# Altium PCB MRF24J40MA.PcbDoc
Units mil, origin at the board's own origin, x right, y up, seen from the top; angles counter-clockwise.
Board outline 1500 x 785 mil, 2 copper layers (Top Layer, Bottom Layer); 3 components, 40 nets, 24 pads, 0 vias.
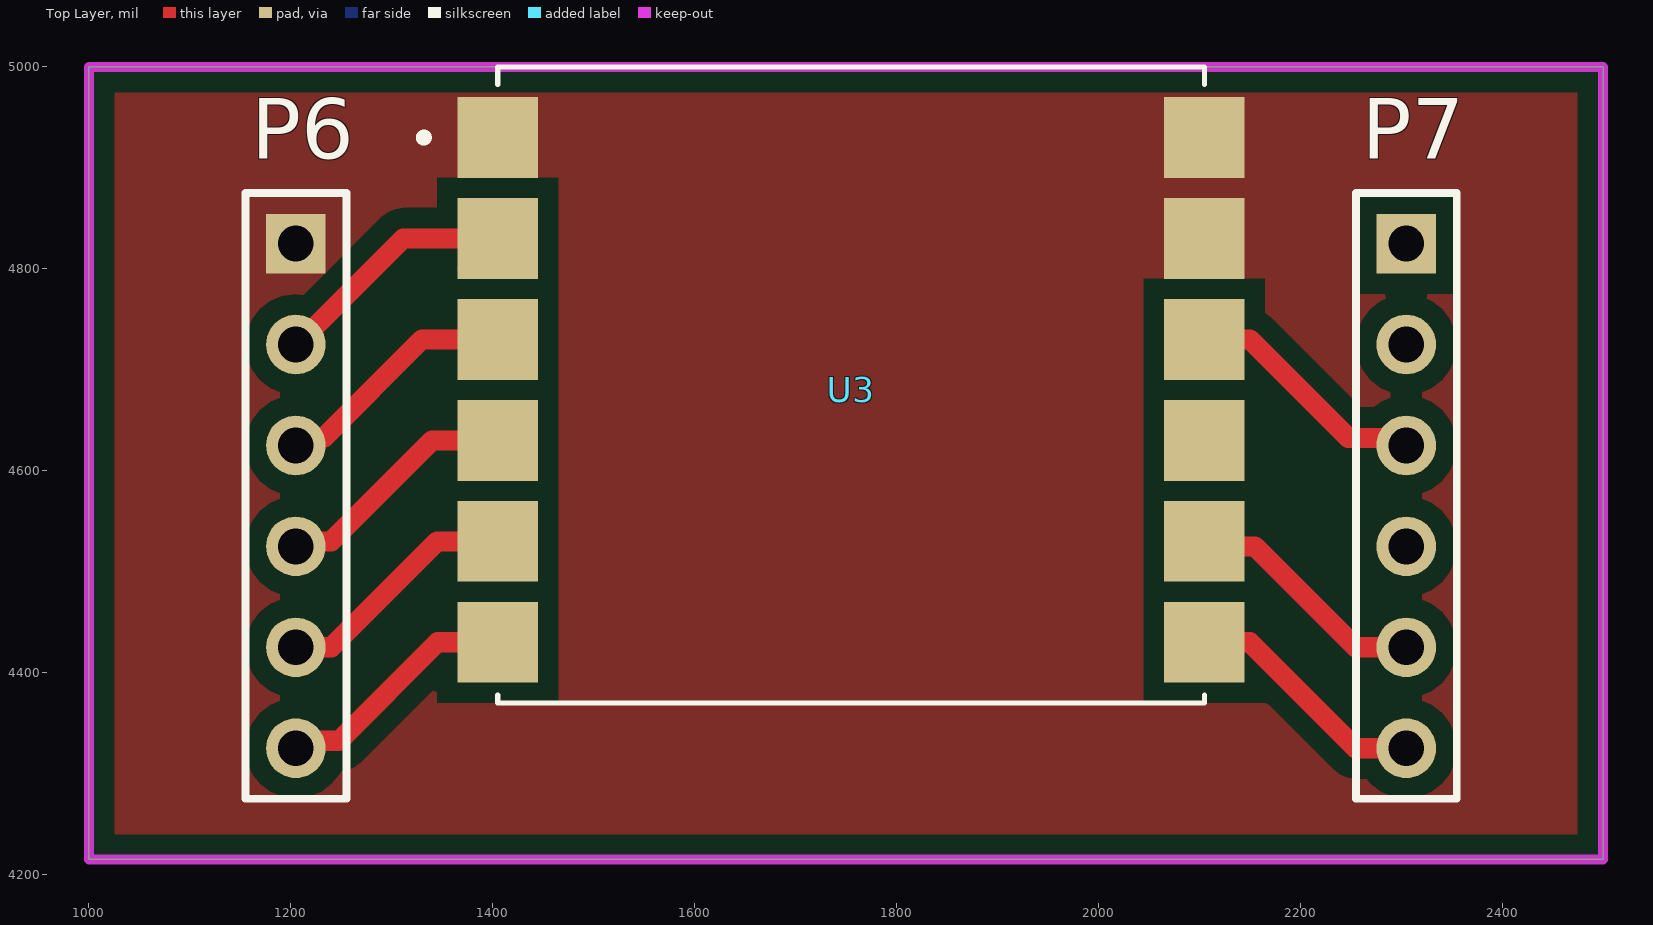
[diagram p0: Top Layer view]
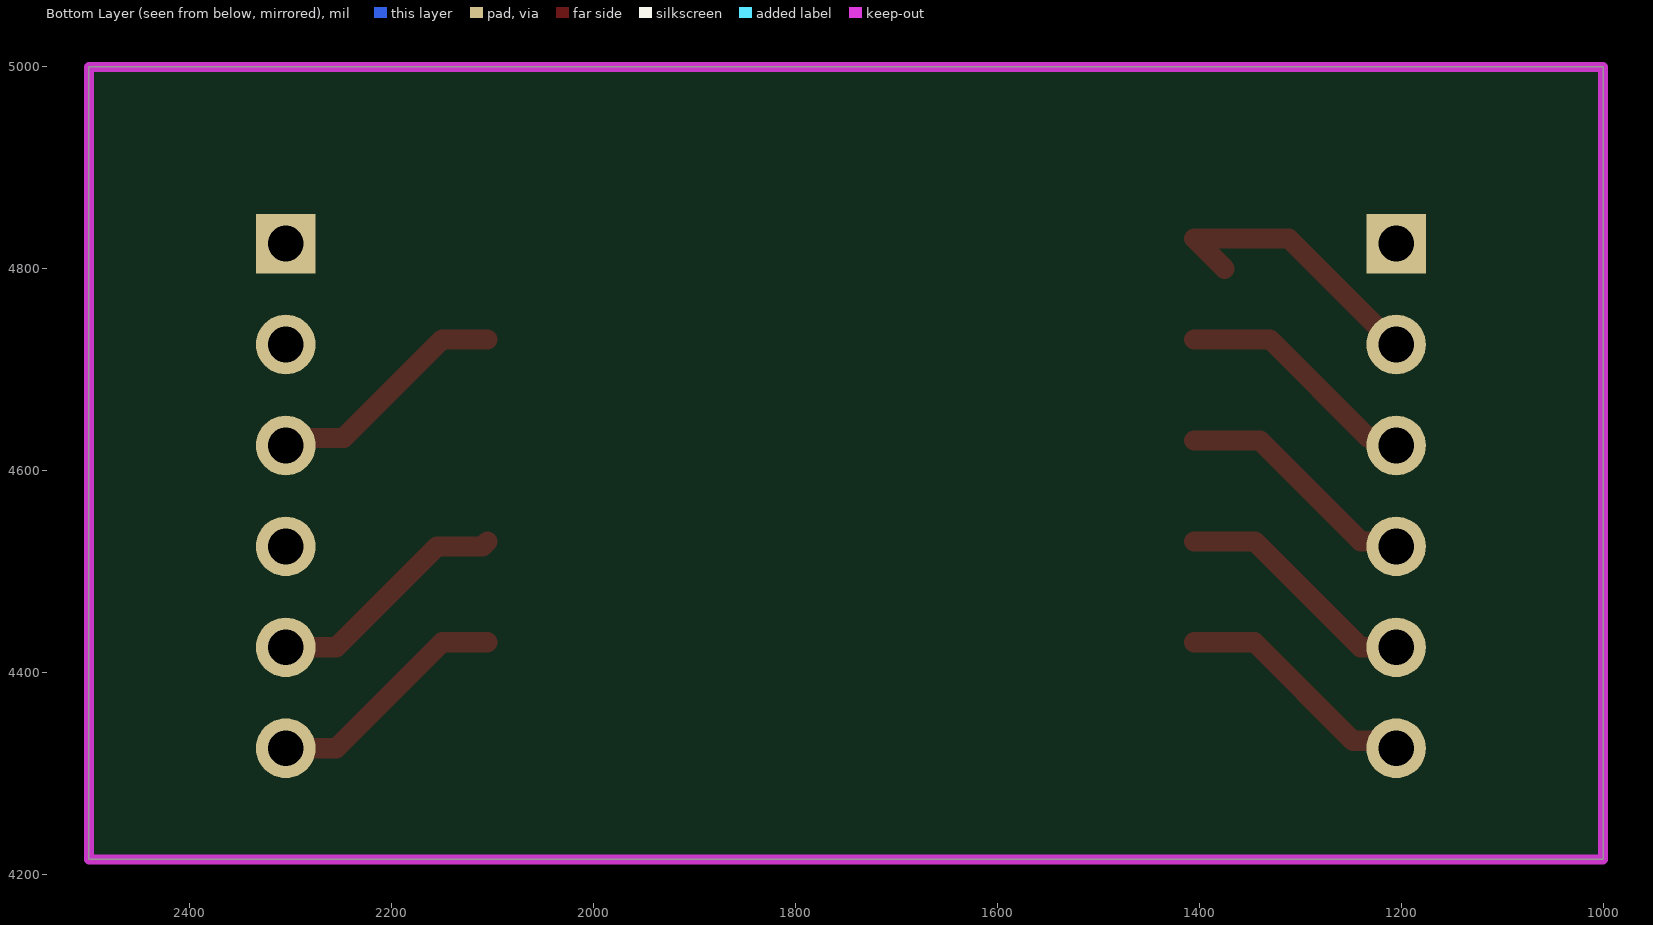
[diagram p1: Bottom Layer view, seen from below]

## Layer stack, top to bottom
Top Solder: solder mask 0.4, Solder Resist, Dk 3.5
Top Layer: signal copper 1.4
Dielectric 1: dielectric 12.6, FR-4, Dk 4.8
Bottom Layer: signal copper 1.4
Bottom Solder: solder mask 0.4, Solder Resist, Dk 3.5

## Board outline
1000,5000 2500,5000 2500,4215 1000,4215

## Design rules (kind name [scope] priority, off if disabled: settings)
Clearance [All] p1: gap=20 ignorepadtopadclearanceinfootprint=TRUE
PolygonConnect [All] p1: connectstyle=Direct reliefconductorwidth=10 reliefentries=4 polygonreliefangle="90 Angle" airgapwidth=10
RoutingVias [All] p1: holewidth=28 width=50 viastyle="Through Hole" minholewidth=28 minwidth=50 maxholewidth=28 maxwidth=50
SolderMaskExpansion [All] p1: expansion=4 istentingtop=FALSE
Width [All] p1: maxlimit=30 minlimit=10 preferedwidth=20
30 further rules are at their usual default settings.

## Components (designator, comment, footprint, x,y, rotation, side; value= is the part's Value field where it differs from the comment)
P6 "Header 6" HDR1X6 1205,4825 r270 top
P7 "Header 6" HDR1X6 2305,4825 r270 top
U3 "MRF24J40MA" MODULE_MRF24J40MA 1755,4685 r0 top

## Footprints (in the part's own frame and the unit in brackets; to place one, negate y for a bottom-side part, rotate by r counter-clockwise, add the part's x,y. Pads: shape width x height; smd on the part's side, far side on the other; paste and mask are expansions set on the pad)
HDR1X6 [mm] "Connector; Header; 6 Position"
  rect 1.5x1.5 hole 0.9: 1(0,0)
  round 1.5 hole 0.9: 2(2.54,0) 3(5.08,0) 4(7.62,0) 5(10.16,0) 6(12.7,0)
  silkscreen extent -1.27,-1.27 13.97,1.27
MODULE_MRF24J40MA [mil]
  rect 80x80 smd: 1(-350,245) 2(-350,145) 3(-350,45) 4(-350,-55) 5(-350,-155) 6(-350,-255) 7(350,-255) 8(350,-155) 9(350,-55) 10(350,45) 11(350,145) 12(350,245)
  silkscreen extent -427,-315 350,315

## Part data
P6 P7: "Header, 6-Pin", LatestRevisionDate=17-Jul-2002, LatestRevisionNote="Re-released for DXP Platform.", Publisher="Altium Limited"
U3: "802.15.4 Zigbee Transceiver Module 2.4GHz Integrated, Trace Surface Mount", Package=None, Availability=Unavailable, MF="{'manufacturer': u'Microchip'}", MP=MRF24J40MA, Price=None

## Nets (pads, with @x,y where several pads share a name; then routed paths per layer and width w, separated by ;. In a path a pad name is that pad's centre, name@x,y a point inside that pad or via, vN(x,y) a via of type N, cw(c..) or ccw(c..) an arc to the next point about the centre after c; other vN are vias at no path point)
3.3V: 
3.3V2: P7.3 U3.10 | length 243.5
  Top Layer w20: U3.10 2150,4730 2247.53,4632.47 2297.53,4632.47 P7.3
5V: 
CS: 
CS2: P7.5 U3.8 | length 243.5
  Top Layer w20: U3.8 2110,4525 2155.05,4525 2255.05,4425 P7.5
GND2: 
GND3: P6.1 U3.1 U3.11 U3.12
INT: 
INT2: P6.4 U3.4 | length 243.5
  Top Layer w20: P6.4 1210,4530 1240,4530 1340,4630 U3.4
NetP1_3: 
NetP1_4: 
NetP1_7: 
NetP1_8: 
NetP1_9: 
NetP1_10: 
NetP1_11: 
NetP1_13: 
NetP1_14: 
NetP3_4: 
NetP3_5: 
NetP3_6: 
NetP3_7: 
NetP3_8: 
NetP3_9: 
NetP3_13: 
NetP3_14: 
NetP3_15: 
NetR1_2: 
RESET: 
RESET2: P6.2 U3.2 | length 285.9
  Top Layer w20: P6.2 1206.48,4725 1311.48,4830 U3.2 U3.2@1375,4800
RGB: 
SCK: 
SCK2: P6.6 U3.6 | length 243.5
  Top Layer w20: P6.6 1212.47,4332.47 1247.8,4332.47 1345.32,4430 U3.6
SDI: 
SDI2: P6.5 U3.5 | length 243.5
  Top Layer w20: P6.5 1240,4425 1345,4530 U3.5
SDO: 
SDO2: P7.6 U3.7 | length 243.5
  Top Layer w20: U3.7 2150.05,4430 2255.05,4325 P7.6
VIN: 
WAKE: 
WAKE2: P6.3 U3.3 | length 243.5
  Top Layer w20: P6.3 1212.47,4632.47 1232.47,4632.47 1330,4730 U3.3
pads on no net: P7.1 P7.2 P7.4 U3.9

## Polygon pours and split planes (outlines as drawn)
GND3 on Top Layer "GND3_L01_P000" (solid, remove dead copper, pour order 0): 1000,5000 2500,5000 2500,4240 1000,4240

## Keep-outs
Keep-Out Layer:
  the board outline again, w10

## Text inside footprints (layer, text, board x,y; h text height)
U3: Mechanical 13 "PCB Edge" at 2130.98,5020.87 h50